# Altium PCB 20K Control Board V1.1.PcbDoc (part 15 of 24)
Units mm, origin at the board's own origin, x right, y up, seen from the top; angles counter-clockwise.
Board outline 132 x 260 mm, 4 copper layers (Top Layer, GND, VCC, Bottom Layer); 1384 components, 779 nets, 4515 pads, 1774 vias.
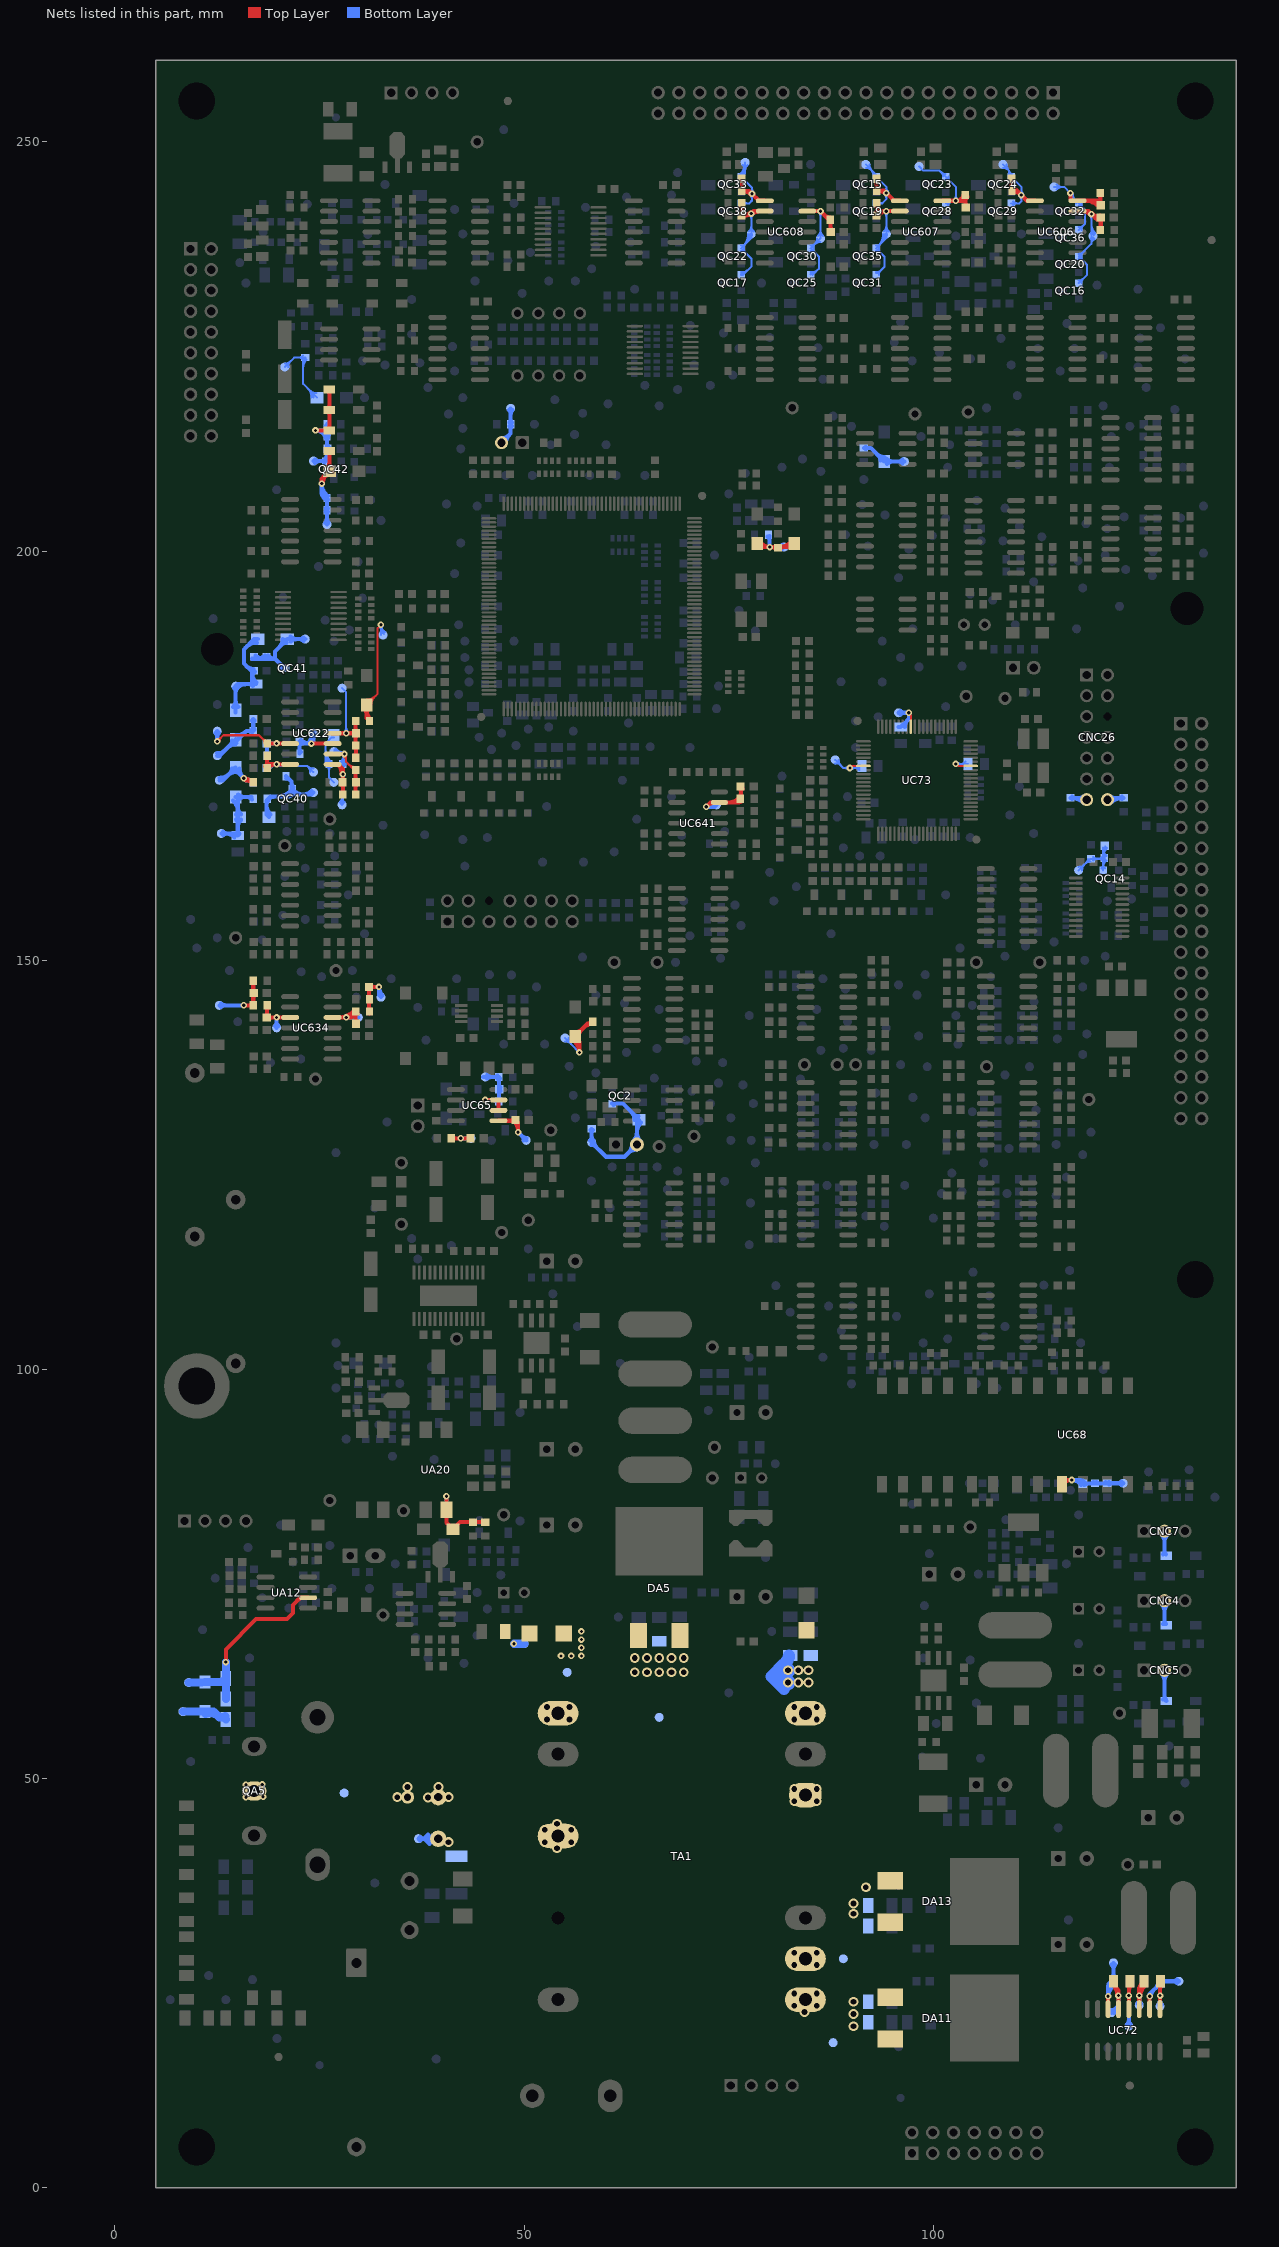
[diagram p17: the nets of this part, all layers, seen from the top]

## Via types
v1: diameter 0.8, hole 0.4, Top Layer to Bottom Layer, tented both sides, 1354 vias
v2: diameter 1.2, hole 0.7, Top Layer to Bottom Layer, 261 vias
v3: diameter 0.8, hole 0.4, Top Layer to Bottom Layer, 58 vias
v4: diameter 1.2, hole 0.7, Top Layer to Bottom Layer, tented top, 58 vias
v5: diameter 0.8, hole 0.4, Top Layer to Bottom Layer, tented top, 22 vias
v6: diameter 1.2, hole 0.7, Top Layer to Bottom Layer, tented both sides, 13 vias
v7: diameter 1.2, hole 0.7, Top Layer to Bottom Layer, tented bottom, 8 vias

## Nets (pads, with @x,y where several pads share a name; then routed paths per layer and width w, separated by ;. In a path a pad name is that pad's centre, name@x,y a point inside that pad or via, vN(x,y) a via of type N, cw(c..) or ccw(c..) an arc to the next point about the centre after c; other vN are vias at no path point) (continued)
NetCC227_1: CC227.1 pad.ICT@117.75,161 QC14.1 RC360.1 RC366.2 | length 18.1
  Bottom Layer w0.25: pad.ICT@117.75,161 119.15,162.4 RC360.1@119.25,162.4 RC366.2@120.75,162.4 ; pad.ICT@117.75,161.425 ccw(c117.75,162.451) 118.476,161.726 ccw(c119.201,161) pad.ICT@118.175,161 ; 118.56,161.81 cw(c119.2,161.17) RC360.1@119.2,162.075 ; 118.681,161.931 ccw(c118.211,162.4) RC360.1@118.875,162.4 ; RC360.1@119.53,162.17 cw(c120.085,161.615) 120.085,162.4 cw(c120.085,163.185) RC360.1@119.53,162.63 ; 119.995,162.4 ccw(c119.995,163.355) RC366.2@120.67,162.68 ; 120.236,162.4 cw(c120.236,161.786) RC366.2@120.67,162.22 ; QC14.1@120.515,161.235 ccw(c119.948,161.802) 120.75,161.802 ccw(c121.552,161.802) QC14.1@120.985,161.235 ; QC14.1@120.75,161 RC366.2@120.75,162.4 ; QC14.1@120.75,161.303 cw(c122.047,161.303) RC366.2@121.13,162.22 ; 120.75,161.907 cw(c121.443,161.907) RC366.2@120.953,162.397 ; RC366.2@120.75,162.612 cw(c122.338,162.612) CC227.1@121.215,163.735 ; 120.75,163.093 ccw(c121.443,163.093) RC366.2@120.953,162.603 ; 120.75,163.215 cw(c121.735,163.215) CC227.1@121.038,163.912 ; CC227.1@120.75,163.697 ccw(c122.047,163.697) RC366.2@121.13,162.78 ; CC227.1@120.75,163.8 RC366.2@120.75,162.4 ; RC366.2@120.8,162.4 RC366.2@120.75,162.4
NetCC228_2: CC228.2 pad.ICT@91.75,247.25 QC15.1 QC19.1 RC361.1 UC607.1 | length 21.9
  Top Layer w0.5: CC228.2@92.873,245.323 cw(c92.446,244.896) 93.05,244.896 cw(c93.654,244.896) CC228.2@93.227,245.323 ; RC361.1@93.05,244.05 CC228.2@93.05,245.5 ; 93.05,244.654 ccw(c93.704,244.654) 93.241,244.191 ccw(c93.583,244.533) 93.583,244.05 ccw(c93.583,243.567) RC361.1@93.241,243.909 ; RC361.1@93.1,244.05 93.95,244.05 ; RC361.1@93.164,244.05 cw(c93.164,242.664) v1@94.144,243.644 ; v1@94.5,243.5 95.19,242.81 UC607.1@95.9,242.81
  Bottom Layer w0.25: pad.ICT@91.75,246.825 cw(c91.75,245.799) 92.476,246.524 cw(c93.201,247.25) pad.ICT@92.175,247.25 ; pad.ICT@91.75,247.25 93,246 QC15.1@93,245.75 94.25,244.5 v1(94.25,243.75) 94.25,243 93.75,242.5 QC19.1@93,242.5 ; 92.256,246.744 cw(c91.262,245.75) QC15.1@92.668,245.75 ; 92.683,246.317 cw(c92.116,245.75) QC15.1@92.918,245.75 ; QC15.1@93,245.418 cw(c93,244.616) 93.567,245.183 cw(c94.134,245.75) QC15.1@93.332,245.75 ; QC19.1@93.246,242.277 cw(c93.75,241.82) 93.75,242.5 cw(c93.75,243.18) QC19.1@93.246,242.723 ; v1@94.056,243.556 cw(c93.586,243.086) 94.25,243.086 cw(c94.914,243.086) v1@94.444,243.556 ; v1@94.056,243.944 ccw(c93.586,244.414) 94.25,244.414 ccw(c94.914,244.414) v1@94.444,243.944
NetCC229_2: CC229.2 pad.ICT@119.5,238.5 QC16.1 QC20.1 RC362.1 UC606.13 | length 30.1
  Top Layer w0.5: UC606.13@117.6,241.54 118.96,241.54 119.75,240.75 CC229.2@120.45,240.75 ; UC606.13@118.097,241.54 cw(c118.097,239.968) v1@119.208,241.079 ; v1@119.31,241.19 ccw(c119.989,241.869) CC229.2@120.355,240.981 ; v1@119.437,241.272 ccw(c120.45,241.994) CC229.2@120.45,240.75 ; 119.84,240.66 ccw(c120.298,241.118) CC229.2@120.545,240.519 ; RC362.1@120.259,239.441 ccw(c119.796,239.904) 120.45,239.904 ; CC229.2@120.273,240.927 cw(c119.846,241.354) 119.846,240.75 cw(c119.846,240.146) 120.273,240.573 cw(c119.846,240.146) 120.45,240.146 cw(c121.054,240.146) CC229.2@120.627,240.573 ; RC362.1@120.45,239.3 CC229.2@120.45,240.75
  Bottom Layer w0.25: QC16.1@117.75,232.75 117.779,232.75 118.75,233.721 118.75,235.029 117.779,236 119.315,237.535 v1(119.315,241.185) ; QC16.1@117.75,233.082 ccw(c117.75,233.954) 118.367,233.338 ; QC20.1@117.75,235.668 cw(c117.75,234.796) 118.367,235.412 ; QC20.1@117.75,236.332 ccw(c117.75,237.204) 118.367,236.588 ; QC16.1@118.082,232.75 cw(c118.814,232.75) 118.297,233.268 ; 118.297,235.482 cw(c118.814,236) 118.082,236 cw(c118.814,236) 118.297,236.518 ; v1@119.12,240.991 cw(c118.651,240.522) 119.315,240.522 cw(c119.978,240.522) v1@119.509,240.991 ; pad.ICT@119.199,238.199 cw(c118.922,237.922) 119.315,237.922 ; pad.ICT@119.199,238.801 ccw(c118.922,239.078) 119.315,239.078 ; 119.315,237.518 cw(c119.985,237.518) pad.ICT@119.688,238.119 ; 119.315,237.92 cw(c119.786,237.92) pad.ICT@119.577,238.343 ; 119.315,239.37 ccw(c120.37,239.37) pad.ICT@119.624,238.624 ; 119.315,239.974 ccw(c120.974,239.974) pad.ICT@119.801,238.801
NetCC230_2: CC230.2 pad.ICT@77.75,238.75 QC17.1 QC22.1 RC364.1 UC608.2 | length 27.3
  Top Layer w0.5: CC230.2@76.373,241.177 ccw(c75.826,241.724) 76.6,241.724 ; RC364.1@76.459,242.309 cw(c76.117,241.967) 76.6,241.967 cw(c77.083,241.967) RC364.1@76.741,242.309 ; RC364.1@76.6,242.5 76.6,241.05 v1@77.55,241.05 ; CC230.2@76.727,240.823 cw(c77.274,240.276) 77.274,241.05 ; CC230.2@76.905,241.05 ccw(c76.905,242.095) v1@77.644,241.356 ; v1@77.856,241.144 cw(c78.812,240.188) UC608.2@78.812,241.54 ; 78.04,241.54 UC608.2@79.4,241.54
  Bottom Layer w0.25: QC17.1@76.5,233.75 76.75,233.75 77.75,234.75 77.75,235.75 QC22.1@76.5,237 77.75,238.25 v1(77.75,241.25) ; QC17.1@76.5,233.832 ccw(c76.5,234.634) 77.067,234.067 ; QC17.1@76.5,234.082 ccw(c76.5,235.488) 77.494,234.494 ; QC22.1@76.5,236.668 cw(c76.5,235.866) 77.067,236.433 cw(c77.634,237) 76.832,237 cw(c77.634,237) 77.067,237.567 cw(c76.5,238.134) QC22.1@76.5,237.332 ; QC22.1@76.75,237.25 ccw(c75.356,238.644) pad.ICT@77.325,238.731 ; 77.151,237.651 ccw(c76.125,238.678) pad.ICT@77.575,238.742 ; pad.ICT@77.449,239.051 ccw(c76.724,239.776) 77.75,239.776 ccw(c78.776,239.776) pad.ICT@78.051,239.051 ; 77.553,238.053 ccw(c76.894,238.712) pad.ICT@77.825,238.753 ; v1@77.556,241.056 cw(c77.086,240.586) 77.75,240.586 cw(c78.414,240.586) v1@77.944,241.056
NetCC237_2: CC237.2 pad.ICT@98.25,247 QC23.1 QC28.1 RC371.1 UC607.14 | length 22.7
  Top Layer w0.5: UC607.14@101.1,242.81 v1(102.75,242.81) ; 103.435,242.81 ccw(c103.435,243.599) RC371.1@104.186,243.359 ; RC371.1@103.709,243.511 cw(c102.75,243.817) v1(102.75,242.81) ; RC371.1@103.759,243.309 cw(c103.417,242.967) 103.9,242.967 cw(c104.383,242.967) RC371.1@104.041,243.309 ; 103.84,242.81 v1(102.75,242.81) ; CC237.2@103.9,242.05 RC371.1@103.9,243.5 ; 103.9,242.724 ccw(c104.674,242.724) CC237.2@104.127,242.177
  Bottom Layer w0.25: pad.ICT@98.25,247 98.75,246.5 100.75,246.5 QC23.1@101.5,245.75 102.75,244.5 v1(102.75,242.81) ; QC23.1@101.168,245.75 ccw(c100.366,245.75) 100.933,246.317 ccw(c101.5,246.884) QC23.1@101.5,246.082 ; QC23.1@101.5,245.418 cw(c101.5,244.616) 102.067,245.183 cw(c102.634,245.75) QC23.1@101.832,245.75 ; QC28.1@101.567,242.452 cw(c102.263,241.953) 102.263,242.81 ; QC28.1@101.69,242.81 v1(102.75,242.81) ; QC28.1@101.77,242.307 cw(c102.75,241.605) v1(102.75,242.81) ; v1@102.556,242.616 ccw(c102.086,242.146) 102.086,242.81 ccw(c102.086,243.474) 102.556,243.004 ccw(c102.086,243.474) 102.75,243.474 ccw(c103.414,243.474) v1@102.944,243.004
NetCC238_2: CC238.2 pad.ICT@108.5,247.25 QC24.1 QC29.1 RC372.1 UC606.1 | length 23.5
  Top Layer w0.5: CC238.2@109.373,245.323 cw(c108.946,244.896) 109.55,244.896 cw(c110.154,244.896) CC238.2@109.727,245.323 ; RC372.1@109.454,244.212 cw(c109.731,243.716) 110.132,244.118 ; RC372.1@109.55,244.05 CC238.2@109.55,245.5 ; 109.55,244.654 ccw(c110.204,244.654) RC372.1@109.741,244.191 ; RC372.1@109.593,244.25 cw(c109.614,243.319) 110.273,243.977 ; RC372.1@109.6,244 110.25,244 v1(110.75,243.5) 111.44,242.81 UC606.1@112.4,242.81 ; RC372.1@109.698,243.775 cw(c110.066,243.116) v1@110.6,243.65 ; RC372.1@109.741,243.859 cw(c110.083,243.517) 110.083,244 cw(c110.083,244.483) RC372.1@109.741,244.141 ; 111.242,243.008 ccw(c111.6,243.367) UC606.1@111.6,242.86
  Bottom Layer w0.25: pad.ICT@108.5,246.825 cw(c108.5,245.799) 109.226,246.524 cw(c109.951,247.25) pad.ICT@108.925,247.25 ; pad.ICT@108.5,247.25 109.25,246.5 ; QC24.1@109.25,246 109.25,246.5 ; QC24.1@109.25,246.178 ccw(c109.61,246.178) QC24.1@109.52,245.83 ; QC29.1@109.5,242.5 110.5,242.5 110.75,242.75 v1(110.75,243.5) 110.75,244.5 QC24.1@109.5,245.75 ; QC24.1@109.5,245.418 cw(c109.5,244.616) 110.067,245.183 cw(c110.634,245.75) QC24.1@109.832,245.75 ; QC24.1@109.582,246.072 cw(c109.692,246.5) 109.25,246.5 ; QC29.1@109.735,242.265 cw(c110.302,241.698) 110.302,242.5 cw(c110.302,243.302) QC29.1@109.735,242.735 ; v1@110.556,243.306 cw(c110.086,242.836) 110.75,242.836 cw(c111.414,242.836) v1@110.944,243.306 ; v1@110.556,243.694 ccw(c110.086,244.164) 110.75,244.164 ccw(c111.414,244.164) v1@110.944,243.694
NetCC239_2: CC239.2 pad.ICT@86.21,238.21 QC25.1 QC30.1 RC373.1 UC608.13 | length 24.4
  Top Layer w0.5: UC608.13@84.6,241.54 v1(86.21,241.54) 87.45,240.3 CC239.2@87.45,239 ; 86.717,241.033 ccw(c87.4,241.716) RC373.1@87.4,240.75 ; RC373.1@87.259,240.309 cw(c86.796,239.846) 87.45,239.846 ; CC239.2@87.273,239.177 ccw(c86.846,239.604) 87.45,239.604 ccw(c88.054,239.604) CC239.2@87.627,239.177
  Bottom Layer w0.25: QC25.1@85,233.832 ccw(c85,234.634) 85.567,234.067 ; QC25.1@85,234.082 ccw(c85,235.488) 85.994,234.494 ; QC30.1@85,236.668 cw(c85,235.866) 85.567,236.433 cw(c86.134,237) 85.332,237 cw(c86.134,237) 85.567,237.567 cw(c85,238.134) QC30.1@85,237.332 ; QC25.1@85.25,233.75 86,234.5 86,236 QC30.1@85,237 pad.ICT@86.21,238.21 v1(86.21,241.54) ; pad.ICT@85.785,238.21 cw(c84.759,238.21) 85.484,237.484 cw(c86.21,236.759) pad.ICT@86.21,237.785 ; pad.ICT@85.909,238.511 ccw(c85.184,239.236) 86.21,239.236 ccw(c87.236,239.236) pad.ICT@86.511,238.511 ; v1@86.016,241.346 cw(c85.546,240.876) 86.21,240.876 cw(c86.874,240.876) v1@86.404,241.346
NetCC250_2: CC250.2 pad.ICT@94.25,238.75 QC31.1 QC35.1 RC383.1 UC607.2 | length 26.6
  Top Layer w0.5: CC250.2@92.82,241.099 cw(c93.49,240.81) 93.49,241.54 ; CC250.2@92.873,241.177 ccw(c92.326,241.724) 93.1,241.724 ; RC383.1@92.959,242.309 cw(c92.617,241.967) 93.1,241.967 cw(c93.583,241.967) RC383.1@93.241,242.309 ; CC250.2@93.1,241.05 RC383.1@93.1,242.5 ; CC250.2@93.28,240.901 cw(c94.25,240.484) v1(94.25,241.54) ; 93.31,241.54 v1(94.25,241.54) ; UC607.2@95.9,241.54 v1(94.25,241.54)
  Bottom Layer w0.25: QC31.1@93,234 93.282,234 94,234.718 94,236 QC35.1@93,237 94.25,238.25 v1(94.25,241.54) ; QC31.1@93,234.082 ccw(c93,234.961) 93.621,234.34 ; QC35.1@93,236.668 cw(c93,235.866) 93.567,236.433 cw(c94.134,237) 93.332,237 cw(c94.134,237) 93.567,237.567 cw(c93,238.134) QC35.1@93,237.332 ; QC35.1@93.25,237.25 ccw(c91.856,238.644) pad.ICT@93.825,238.731 ; QC31.1@93.332,233.75 cw(c94.057,233.75) 93.545,234.263 ; 93.651,237.651 ccw(c92.625,238.678) pad.ICT@94.075,238.742 ; pad.ICT@93.949,239.051 ccw(c93.224,239.776) 94.25,239.776 ccw(c95.276,239.776) pad.ICT@94.551,239.051 ; 94.053,238.053 ccw(c93.394,238.712) pad.ICT@94.325,238.753 ; v1@94.056,241.346 cw(c93.586,240.876) 94.25,240.876 cw(c94.914,240.876) v1@94.444,241.346
NetCC265_2: CC265.2 pad.ICT@24.25,173 RC443.1 RC444.2 UC622.7 | length 19.3
  Top Layer w0.5: RC444.2@18.338,173.696 cw(c18.788,173.445) RC444.2@18.788,173.96 ; RC444.2@18.459,173.691 ccw(c18.117,174.033) 18.6,174.033 ccw(c19.083,174.033) RC444.2@18.741,173.691 ; RC443.1@18.459,174.809 cw(c18.117,174.467) 18.6,174.467 cw(c19.083,174.467) RC443.1@18.741,174.809 ; RC444.2@18.6,173.5 RC443.1@18.6,175 ; RC444.2@18.64,173.96 v1@19.64,173.96 ; RC444.2@18.775,173.452 cw(c19.64,172.969) v1@19.64,173.96 ; v1(19.75,173.96) v1@19.64,173.96 ; v1@19.856,174.066 ccw(c20.16,174.37) 20.16,173.94 ; UC622.7@21.4,173.94 19.66,173.94 v1@19.64,173.96
  Bottom Layer w0.25: v1(19.75,173.96) 19.79,173.96 20,173.75 23.5,173.75 pad.ICT@24.25,173 ; v1@19.768,173.978 ccw(c20.317,174.527) 20.317,173.75 ; v1@19.944,174.154 ccw(c20.921,175.131) 20.921,173.75 ; pad.ICT@23.825,173 ccw(c22.799,173) 23.524,173.726 ccw(c24.25,174.451) pad.ICT@24.25,173.425
  Bottom Layer w0.5: CC265.2@18.331,173.62 cw(c18.905,173.305) CC265.2@18.905,173.96 ; CC265.2@18.6,173.45 19.11,173.96 v1(19.75,173.96) ccw(c19.75,172.841) CC265.2@18.769,173.38
NetCC266_2: CC266.2 pad.ICT@12.5,178 RC445.1 RC446.2 UC622.5 | length 20
  Top Layer w0.25: v1(12.5,176.75) 13.25,177.5 17.6,177.5 RC445.1@18.6,176.5 ; v1@12.5,177.025 ccw(c12.5,177.689) 12.969,177.219 ccw(c13.439,176.75) v1@12.775,176.75 ; 17.96,177.14 ccw(c18.6,177.78) RC445.1@18.6,176.875 ; 18.081,177.019 cw(c17.611,176.55) RC445.1@18.275,176.55
  Top Layer w0.5: RC445.1@18.6,176.5 v1(19.75,176.5) UC622.5@21.38,176.5 ; RC445.1@18.741,176.359 cw(c19.083,176.017) 19.083,176.5 cw(c19.083,176.983) RC445.1@18.741,176.641 ; UC622.5@21.38,176.48 UC622.5@21.4,176.48
  Bottom Layer w0.5: pad.ICT@12.288,177.788 cw(c11.776,177.276) 12.5,177.276 cw(c13.224,177.276) pad.ICT@12.712,177.788 ; v1(12.5,176.75) pad.ICT@12.5,178 ; CC266.2@18.373,176.323 cw(c17.826,175.776) 18.6,175.776 ; RC446.2@18.459,175.191 ccw(c18.117,175.533) 18.6,175.533 ccw(c19.083,175.533) RC446.2@18.741,175.191 ; CC266.2@18.55,176.5 v1(19.75,176.5) ; RC446.2@18.6,175 CC266.2@18.6,176.45 ; CC266.2@18.727,176.323 cw(c19.154,175.896) 19.154,176.5 cw(c19.154,177.104) CC266.2@18.727,176.677
NetCC270_2: CC270.2 DC45.2 DC46.1 pad.ICT@13,165.5 RC458.2 | length 19.3
  Bottom Layer w0.5: pad.ICT@13,165.5 CC270.2@15,165.5 ; pad.ICT@13.212,165.288 cw(c13.724,164.776) 13.724,165.5 cw(c13.724,166.224) pad.ICT@13.212,165.712 ; pad.ICT@13.472,165.5 cw(c13.472,163.922) CC270.2@14.588,165.038 ; DC46.1@14.432,169.532 cw(c13.06,168.16) DC45.2@15,168.16 ; DC46.1@14.75,169.95 RC458.2@16.7,169.95 ; DC45.2@14.782,167.182 cw(c14.255,166.655) 15,166.655 ; DC45.2@14.782,167.818 ccw(c14.255,168.345) 15,168.345 ; CC270.2@14.788,165.462 ccw(c14.276,165.974) 15,165.974 ccw(c15.724,165.974) CC270.2@15.212,165.462 ; CC270.2@15,165.25 DC46.1@15,169.7 ; 15,166.172 cw(c16.428,166.172) DC45.2@15.418,167.182 ; 15,168.828 ccw(c16.428,168.828) DC45.2@15.418,167.818 ; DC46.1@15.068,169.632 cw(c15.836,168.864) 15.836,169.95 cw(c15.836,171.036) DC46.1@15.068,170.268 ; 16.055,169.95 cw(c16.055,168.955) RC458.2@16.759,169.659
NetCC272_2: CC272.2 DC47.2 DC48.1 pad.ICT@14.75,183.5 RC461.2 | length 22.8
  Bottom Layer w0.5: DC48.1@14.432,180.968 ccw(c13.664,181.736) 14.75,181.736 ccw(c15.836,181.736) DC48.1@15.068,180.968 ; pad.ICT@14.538,183.288 cw(c14.026,182.776) 14.75,182.776 cw(c15.474,182.776) 14.962,183.288 cw(c16.078,182.172) 16.078,183.75 ; DC48.1@14.75,180.3 DC48.1@14.75,180.55 pad.ICT@14.75,183.5 15,183.75 CC272.2@16.75,183.75 ; 15.984,188.234 cw(c17.35,186.869) DC47.2@17.35,188.8 ; 16.011,185.989 ccw(c16.95,186.928) RC461.2@16.95,185.6 ; 16.75,184.434 cw(c17.916,184.434) RC461.2@17.091,185.259 ; CC272.2@16.838,183.538 ccw(c16.326,183.026) 16.326,183.75 ccw(c16.326,184.474) CC272.2@16.838,183.962 ; RC461.2@17,185.4 16.6,185.4 15.75,186.25 15.75,188 17,189.25 DC47.2@17.45,189.25 ; CC272.2@17.25,183.75 CC272.2@16.75,183.75 ; CC272.2@17.257,183.967 cw(c18.383,185.15) 16.75,185.15 CC272.2@16.75,183.75
NetCC282_2: CC282.2 pad.ICT@27.75,183.25 RC482.2 RC483.1 RC485.2 UC622.11 | length 18.8
  Top Layer w0.5: UC622.11@26.6,177.75 CC282.2@29.45,177.75 ; RC482.2@29.259,174.941 ccw(c28.796,175.404) 29.45,175.404 ; RC485.2@29.259,176.059 cw(c28.796,175.596) 29.45,175.596 ; RC485.2@29.259,176.441 ccw(c28.917,176.783) 29.4,176.783 ccw(c29.883,176.783) RC485.2@29.541,176.441 ; RC483.1@29.259,179.059 cw(c28.917,178.717) 29.4,178.717 cw(c29.883,178.717) RC483.1@29.541,179.059 ; CC282.2@29.273,177.573 ccw(c28.846,177.146) 28.846,177.75 ccw(c28.846,178.354) CC282.2@29.273,177.927 ; RC482.2@29.4,174.75 29.45,174.8 RC485.2@29.45,176.25 ; RC485.2@29.4,176.25 RC483.1@29.4,179.25 ; 29.4,177.026 cw(c30.174,177.026) CC282.2@29.627,177.573 ; 29.4,178.474 ccw(c30.174,178.474) CC282.2@29.627,177.927
  Bottom Layer w0.25: pad.ICT@27.75,183.25 28.25,182.75 v1(28.25,177.75) ; v1@28.056,177.944 ccw(c27.586,178.414) 28.25,178.414 ccw(c28.914,178.414) v1@28.444,177.944
NetCC283_2: CC283.2 pad.ICT@26.75,175.5 RC484.1 RC486.2 RC489.2 UC622.9 | length 18.2
  Top Layer w0.25: v1@27.873,174.992 cw(c27.287,174.227) 28.25,174.227 ; v1@28.025,175.19 cw(c27.675,174.734) 28.25,174.734 ; v1(28.04,175.21) 28.25,175 28.25,174.25 29.25,173.25 RC486.2@29.4,173.25 ; 28.504,173.996 ccw(c29.4,174.892) RC486.2@29.4,173.625 ; 28.931,173.569 ccw(c29.4,174.039) RC486.2@29.4,173.375 ; RC486.2@28.987,173.513 cw(c28.773,173.3) RC486.2@29.075,173.3
  Top Layer w0.5: UC622.9@26.6,175.21 v1(28.04,175.21) ; RC489.2@29.259,170.441 ccw(c28.917,170.783) 29.4,170.783 ccw(c29.883,170.783) RC489.2@29.541,170.441 ; RC486.2@29.259,173.059 cw(c28.917,172.717) 29.4,172.717 cw(c29.883,172.717) RC486.2@29.541,173.059 ; RC489.2@29.4,170.25 RC486.2@29.4,173.25 ; 29.4,171.026 cw(c30.174,171.026) CC283.2@29.627,171.573 ; 29.4,172.474 ccw(c30.174,172.474) CC283.2@29.627,171.927
  Bottom Layer w0.5: pad.ICT@26.75,175.25 28,175.25 cw(c28,176.645) pad.ICT@26.971,175.703 ; 27.581,175.25 cw(c27.581,174.751) v1@27.934,175.104 ; RC484.1@27.709,174.191 ccw(c26.908,174.992) v1@28.04,174.992 ; RC484.1@27.85,173.75 28.04,173.94 v1(28.04,175.21)
NetCC286_2: CC286.2 DC41.1 DC43.1 DC44.1 pad.ICT@24.25,211 QC42.1 RC490.1 RC492.2 | length 27.6
  Top Layer w0.5: v1(24.5,214.75) DC41.1@26.2,214.75 DC43.1@26.2,217.25 DC44.1@26.2,219.75 ; DC41.1@25.823,214.573 ccw(c25.396,214.146) 25.396,214.75 ccw(c25.396,215.354) DC41.1@25.823,214.927 ; DC41.1@26.023,214.927 ccw(c25.596,215.354) 26.2,215.354 ccw(c26.804,215.354) DC41.1@26.377,214.927 ; DC43.1@26.023,217.073 cw(c25.596,216.646) 26.2,216.646 cw(c26.804,216.646) DC43.1@26.377,217.073 ; DC43.1@26.023,217.427 ccw(c25.596,217.854) 26.2,217.854 ccw(c26.804,217.854) DC43.1@26.377,217.427 ; DC44.1@26.023,219.573 cw(c25.596,219.146) 26.2,219.146 cw(c26.804,219.146) DC44.1@26.377,219.573
  Bottom Layer w0.5: pad.ICT@24.25,211 QC42.1@25.75,211 ; pad.ICT@24.462,210.788 cw(c24.974,210.276) 24.974,211 cw(c24.974,211.724) pad.ICT@24.462,211.212 ; 25.278,214.75 cw(c25.278,213.766) RC492.2@26.173,214.175 ; QC42.1@25.603,210.853 ccw(c25.25,210.5) 25.25,211 ccw(c25.25,211.5) 25.603,211.147 ccw(c24.888,211.862) 25.9,211.862 ; RC492.2@25.718,213.967 ccw(c24.5,213.411) v1(24.5,214.75) 25.9,214.75 ; RC492.2@25.759,213.809 cw(c25.417,213.467) 25.9,213.467 cw(c26.383,213.467) RC492.2@26.041,213.809 ; RC492.2@25.759,214.191 ccw(c25.417,214.533) 25.9,214.533 ccw(c26.383,214.533) RC492.2@26.041,214.191 ; RC490.1@25.759,215.309 cw(c25.417,214.967) 25.9,214.967 cw(c26.383,214.967) RC490.1@26.041,215.309 ; QC42.1@25.9,211.15 RC492.2@25.9,214 RC490.1@25.9,215.5 ; 25.9,211.776 cw(c26.674,211.776) CC286.2@26.127,212.323 ; 25.9,213.224 ccw(c26.674,213.224) CC286.2@26.127,212.677
NetCC306_2: CC306.2 pad.ICT@114.75,244.5 QC32.1 QC36.1 RC384.1 UC606.14 | length 25.1
  Top Layer w0.5: v1(116.75,243.75) 116.75,243 116.94,242.81 UC606.14@117.6,242.81 120.4,242.81 ; UC606.14@118.494,242.81 cw(c118.494,240.294) CC306.2@120.273,242.073 ; 119.702,242.81 cw(c119.702,241.502) 120.627,242.427 cw(c121.174,242.974) 120.4,242.974 ; RC384.1@120.259,243.559 cw(c119.917,243.217) 120.4,243.217 cw(c120.883,243.217) RC384.1@120.541,243.559 ; CC306.2@120.4,242.3 RC384.1@120.4,243.75
  Bottom Layer w0.25: pad.ICT@114.75,244.5 115.984,244.5 116.734,243.75 v1(116.75,243.75) 116.75,243.5 QC32.1@117.75,242.5 118.532,241.718 118.532,240.003 117.779,239.25 QC36.1@117.75,239.25 ; pad.ICT@115.051,244.199 cw(c115.776,243.474) 115.776,244.5 cw(c115.776,245.526) pad.ICT@115.051,244.801 ; v1@116.775,243.75 ccw(c117.439,243.75) 116.969,243.281 ; v1@117.025,243.75 ccw(c118.292,243.75) QC32.1@117.396,242.854 ; QC32.1@117.418,242.5 ccw(c116.616,242.5) 117.183,243.067 ccw(c117.75,243.634) QC32.1@117.75,242.832 ; QC36.1@117.75,239.582 ccw(c117.75,240.454) 118.367,239.838 ; QC32.1@117.75,242.168 cw(c117.75,241.366) 118.317,241.933 cw(c118.884,242.5) QC32.1@118.082,242.5 ; QC36.1@118.082,239.25 cw(c118.814,239.25) 118.297,239.768
NetCC307_2: CC307.2 pad.ICT@77,247.5 QC33.1 QC38.1 RC385.1 UC608.1 | length 24.8
  Top Layer w0.5: CC307.2@76.373,245.323 cw(c75.826,244.776) 76.6,244.776 ; RC385.1@76.459,244.191 ccw(c76.117,244.533) 76.6,244.533 ccw(c77.083,244.533) RC385.1@76.741,244.191 ; CC307.2@76.55,245.5 76.6,245.45 RC385.1@76.6,244 77.5,244 ; RC385.1@76.659,244 cw(c76.659,242.482) v1@77.732,243.555 ; RC385.1@76.741,243.859 cw(c77.083,243.517) 77.083,244 cw(c77.083,244.483) RC385.1@76.741,244.141 ; v1(77.838,243.662) 78.69,242.81 UC608.1@79.4,242.81
  Bottom Layer w0.25: QC33.1@76.29,246.008 ccw(c75.076,247.5) pad.ICT@77,247.5 77,246.25 QC33.1@76.5,245.75 77.838,244.412 v1(77.838,243.662) 77.838,242.838 77.5,242.5 QC38.1@76.5,242.5 ; QC33.1@76.448,245.814 ccw(c75.504,246.974) pad.ICT@77,246.974 ; QC33.1@76.5,245.418 cw(c76.5,244.616) 77.067,245.183 cw(c77.634,245.75) QC33.1@76.832,245.75 ; QC33.1@76.606,245.62 ccw(c75.932,246.449) 77,246.449 ; pad.ICT@76.699,247.199 cw(c75.974,246.474) 77,246.474 cw(c78.026,246.474) pad.ICT@77.301,247.199 ; QC38.1@76.735,242.265 cw(c77.302,241.698) 77.302,242.5 cw(c77.302,243.302) QC38.1@76.735,242.735 ; v1@77.644,243.467 cw(c77.175,242.998) 77.838,242.998 cw(c78.502,242.998) v1@78.033,243.467 ; v1@77.644,243.856 ccw(c77.175,244.325) 77.838,244.325 ccw(c78.502,244.325) v1@78.033,243.856
NetCC346_2: CC346.2 pad.ICT@27.75,169 RC477.2 UC622.8 | length 15
  Top Layer w0.5: UC622.8@26.6,173.94 27.31,173.94 27.85,173.4 RC477.2@27.85,170.25 ; UC622.8@27.245,173.996 cw(c25.769,172.75) v1@27.7,172.75 ; CC346.2@27.623,171.573 cw(c27.076,171.026) 27.85,171.026 ; CC346.2@27.623,171.927 ccw(c27.076,172.474) v1@27.85,172.474 ; RC477.2@27.709,170.441 ccw(c27.367,170.783) 27.85,170.783 ccw(c28.333,170.783) RC477.2@27.991,170.441
  Bottom Layer w0.25: pad.ICT@27.449,169.301 ccw(c26.483,170.267) 27.85,170.267 ; pad.ICT@27.626,169.124 ccw(c27.086,169.664) 27.85,169.664 ; v1@27.656,172.556 cw(c27.186,172.086) 27.85,172.086 cw(c28.514,172.086) v1@28.044,172.556 ; pad.ICT@27.75,169 27.85,169.1 v1(27.85,172.75) ; 27.85,169.785 ccw(c28.535,169.785) pad.ICT@28.051,169.301
NetCC347_2: CC347.2 pad.ICT@24.25,177.75 RC480.2 UC622.10 | length 14.7
  Top Layer w0.5: v1(24,176.48) UC622.10@26.6,176.48
  Bottom Layer w0.5: CC347.2@22.373,176.573 cw(c21.946,176.146) 22.55,176.146 cw(c23.154,176.146) CC347.2@22.727,176.573 ; RC480.2@22.55,175.25 CC347.2@22.55,176.75 ; 22.55,175.904 ccw(c23.204,175.904) RC480.2@22.741,175.441 ; CC347.2@22.727,176.927 ccw(c23.805,178.005) v1@23.805,176.48 ; CC347.2@22.82,176.48 v1(24,176.48) 24.25,176.73 pad.ICT@24.25,177.75 pad.ICT@24.25,177.23 ; 23.5,176.48 pad.ICT@24.25,177.23 ; v1@23.76,176.74 ccw(c23.14,177.36) pad.ICT@23.967,177.65 ; v1@23.894,176.586 ccw(c23.034,177.446) pad.ICT@24.25,177.446 ; pad.ICT@24.038,177.538 cw(c23.526,177.026) 24.25,177.026 cw(c24.974,177.026) pad.ICT@24.462,177.538 ; v1@24.135,176.546 cw(c24.673,176.807) pad.ICT@24.25,177.23
NetCC396_1: CC396.1 pad.ICT@43.5,128.25 RC614.1 | length 6.8
  Top Layer w0.5: RC614.1@41.1,128.25 CC396.1@43.45,128.25 ; RC614.1@41.241,128.109 cw(c41.583,127.767) 41.583,128.25 cw(c41.583,128.733) RC614.1@41.241,128.391 ; CC396.1@43.273,128.073 ccw(c42.846,127.646) 42.846,128.25 ccw(c42.846,128.854) CC396.1@43.273,128.427
  Bottom Layer w0.5: v1(42.25,128.25) pad.ICT@43.5,128.25 pad.ICT@43.75,128.5 ; pad.ICT@43.288,128.038 ccw(c42.776,127.526) 42.776,128.25 ccw(c42.776,128.974) pad.ICT@43.288,128.462
NetCC397_1: CC397.1 pad.4@50.25,128 UC65.5 | length 8.3
  Top Layer w0.5: UC65.5@46.85,130.395 CC397.1@48.95,130.395 ; 48.093,130.395 ccw(c48.093,131.357) CC397.1@48.773,130.677 ; CC397.1@48.773,130.323 cw(c47.622,129.172) v1@49.25,129.172 ; CC397.1@48.95,130.5 49.25,130.2 v1(49.25,129)
  Bottom Layer w0.5: v1(49.25,129) pad.4@50.25,128 ; pad.4@49.95,128 ccw(c49.226,128) 49.738,128.512 ccw(c50.25,129.024) pad.4@50.25,128.3
NetCC398_1: CC398.1 pad.1@45.25,135.75 RC610.1 RC615.2 UC65.6 UC65.7 | length 14.5
  Top Layer w0.5: v1(45.25,132.935) UC65.7@46.85,132.935 UC65.6@46.85,131.665
  Bottom Layer w0.5: pad.1@45,135.75 RC610.1@46.9,135.75 RC615.2@46.9,132.75 ; v1(45.25,132.935) RC615.2@46.635,132.935 ; pad.1@45.462,135.538 cw(c45.974,135.026) 45.974,135.75 cw(c45.974,136.474) pad.1@45.462,135.962 ; 46.091,132.935 cw(c46.091,131.991) RC615.2@46.759,132.659 ; RC615.2@46.759,132.941 ccw(c46.417,133.283) 46.9,133.283 ccw(c47.383,133.283) RC615.2@47.041,132.941 ; RC610.1@46.759,135.559 cw(c46.417,135.217) 46.9,135.217 cw(c47.383,135.217) RC610.1@47.041,135.559 ; RC610.1@46.759,135.609 ccw(c46.417,135.267) 46.417,135.75 ccw(c46.417,136.233) RC610.1@46.759,135.891 ; 46.9,133.526 cw(c47.674,133.526) CC398.1@47.127,134.073 ; 46.9,134.974 ccw(c47.674,134.974) CC398.1@47.127,134.427
NetCC402_1: CC402.1 pad.5@123.2,86.1 RC621.1 RC627.2 UC68.1 | length 15.6
  Top Layer w0.5: UC68.1@115.73,86 116.23,86.5 v1(116.9,86.5) ; UC68.1@115.977,86.153 cw(c116.816,85.314) v1@116.816,86.5 ; UC68.1@115.977,86.647 ccw(c116.334,87.004) 116.334,86.5
  Bottom Layer w0.5: CC402.1@117.864,86.5 cw(c117.864,85.778) CC402.1@118.454,86.194 ; CC402.1@118.046,85.906 ccw(c116.9,85.098) v1(116.9,86.5) 117.8,86.5 CC402.1@118.25,86.05 RC621.1@121.2,86.05 ; CC402.1@118.427,85.873 cw(c118.854,85.446) 118.854,86.05 cw(c118.854,86.654) CC402.1@118.427,86.227 ; 119.096,86.05 ccw(c119.096,86.704) RC627.2@119.559,86.241 ; RC627.2@119.941,86.241 ccw(c120.404,86.704) 120.404,86.05 ; 120.596,86.05 ccw(c120.596,86.704) RC621.1@121.059,86.241 ; RC621.1@121.25,86.1 pad.5@123.2,86.1 ; RC621.1@121.441,85.959 cw(c121.783,85.617) 121.783,86.1 cw(c121.783,86.583) RC621.1@121.441,86.241 ; pad.5@122.988,85.888 ccw(c122.476,85.376) 122.476,86.1 ccw(c122.476,86.824) pad.5@122.988,86.312
NetCC409_1: CC409.1 UC73.54 | length 6.1
  Top Layer w0.25: v1(102.75,174) 103,173.75 UC73.54@104.55,173.75
  Bottom Layer w0.25: v1(102.75,174) CC409.1@104.25,174 ; v1@102.944,173.806 cw(c103.414,173.336) 103.414,174 cw(c103.414,174.664) v1@102.944,174.194 ; CC409.1@103.949,173.699 ccw(c103.224,172.974) 103.224,174 ccw(c103.224,175.026) CC409.1@103.949,174.301
NetCC412_1: CC412.1 pad.6@130,25.25 UC72.2 | length 10.4
  Top Layer w0.5: UC72.2@126.425,21.85 v1(126.425,23.425)
  Bottom Layer w0.5: v1(126.425,23.425) 126.425,23.675 127.75,25 CC412.1@127.75,25.25 pad.6@130,25.25 ; v1@126.575,23.425 cw(c127.541,23.425) 126.858,24.108 ; 127.203,24.453 ccw(c126.605,25.05) CC412.1@127.45,25.05 ; CC412.1@127.323,24.573 cw(c127.75,24.146) CC412.1@127.75,24.75 ; CC412.1@127.962,25.038 cw(c128.474,24.526) 128.474,25.25 cw(c128.474,25.974) CC412.1@127.962,25.462 ; pad.6@129.788,25.038 ccw(c129.276,24.526) 129.276,25.25 ccw(c129.276,25.974) pad.6@129.788,25.462
NetCC413_1: CC413.1 pad.8@125.155,22.345 UC72.3 | length 10.5
  Top Layer w0.5: UC72.3@125.155,21.85 125.155,24.405 125.75,25 CC413.1@125.75,25.25 ; UC72.3@125.155,22.889 cw(c127.911,22.889) CC413.1@125.962,24.838 ; 125.155,24.096 cw(c126.704,24.096) CC413.1@125.609,25.191 ; 125.203,24.453 ccw(c124.605,25.05) CC413.1@125.45,25.05 ; CC413.1@125.323,24.573 cw(c125.75,24.146) CC413.1@125.75,24.75
  Bottom Layer w0.5: pad.8@124.943,22.557 ccw(c124.431,23.069) 125.155,23.069 ccw(c125.879,23.069) pad.8@125.367,22.557 ; pad.8@125.155,22.345 v1(125.155,23.5)
NetCC413_2: CC413.2 pad.7@127.695,22.195 UC72.1 | length 7
  Top Layer w0.5: CC413.2@127.538,24.838 cw(c127.159,24.459) 127.695,24.459 ; UC72.1@127.695,21.85 127.695,25.195 CC413.2@127.75,25.25 ; 127.695,24.193 cw(c128.607,24.193) CC413.2@127.962,24.838
  Bottom Layer w0.5: pad.7@127.483,22.407 ccw(c126.971,22.919) 127.695,22.919 ccw(c128.419,22.919) pad.7@127.907,22.407 ; pad.7@127.695,22.195 v1(127.695,23.5)
NetCC414_1: CC414.1 pad.11 UC72.4 | length 9
  Top Layer w0.5: UC72.4@123.885,21.85 CC414.1@123.885,25.135 ; 123.885,24.048 cw(c125.002,24.048) CC414.1@124.212,24.838
  Bottom Layer w0.5: pad.11@123.673,19.962 ccw(c123.161,20.474) 123.885,20.474 ccw(c124.609,20.474) pad.11@124.097,19.962 ; pad.11@123.885,19.75 v1(123.885,23.5)
NetCC414_2: CC414.2 pad.10 UC72.5 | length 9
  Top Layer w0.5: CC414.2@121.91,24.84 cw(c120.57,23.5) v1@122.465,23.5 ; CC414.2@122,24.75 122.615,24.135 UC72.5@122.615,21.85 ; CC414.2@122.288,24.967 ccw(c122.956,24.776) 122.465,24.285
  Bottom Layer w0.5: pad.10@121.75,21.409 122.615,22.274 v1(122.615,23.5) ; pad.10@121.75,21.709 ccw(c121.75,22.433) 122.262,21.921 ccw(c122.774,21.409) pad.10@122.05,21.409
NetCC415_1: CC415.1 pad.9 UC72.6 | length 14.4
  Top Layer w0.5: UC72.6@121.345,21.85 v1(121.345,23.405)
  Bottom Layer w0.5: v1@121.345,23.279 cw(c123.164,23.279) CC415.1@122.165,24.799 ; v1(121.345,23.405) 121.345,24.345 122,25 CC415.1@122,25.25 pad.9@122,27.5 ; 121.345,24.088 cw(c122.007,24.088) CC415.1@122.002,24.75 ; 121.345,24.206 cw(c122.554,24.206) CC415.1@121.89,25.217 ; 121.345,24.592 cw(c122.003,24.592) CC415.1@122,25.25 ; 121.453,24.453 ccw(c120.855,25.05) CC415.1@121.7,25.05 ; CC415.1@121.573,24.573 cw(c122,24.146) CC415.1@122,24.75 ; CC415.1@121.788,25.662 ccw(c121.276,26.174) 122,26.174 ccw(c122.724,26.174) CC415.1@122.212,25.662 ; pad.9@121.788,27.288 cw(c121.276,26.776) 122,26.776 cw(c122.724,26.776) pad.9@122.212,27.288
NetCC426_1: CC426.1 pad.12 RC664.2 UC641.13 | length 13.3
  Top Layer w0.5: v1(72.25,168.75) 72.79,169.29 UC641.13@73.85,169.29 75.94,169.29 76.5,169.85 CC426.1@76.5,170.95 ; v1@72.485,168.985 cw(c73.1,168.371) UC641.13@73.1,169.24 ; 72.635,169.135 cw(c72.947,168.823) UC641.13@73.084,169.242 ; 74.927,169.29 ccw(c74.927,171.173) RC664.2@76.259,169.841 ; RC664.2@75.973,169.323 cw(c76.4,168.896) RC664.2@76.4,169.5 ; RC664.2@76.134,169.29 ccw(c76.134,169.966) RC664.2@76.612,169.488 ; RC664.2@76.259,169.941 ccw(c75.676,170.524) 76.5,170.524 ; CC426.1@76.273,171.073 cw(c75.726,170.526) 76.5,170.526 ; CC426.1@76.65,170.95 CC426.1@76.7,171
  Bottom Layer w0.5: pad.12@73.279,169.203 cw(c72.25,170.145) v1(72.25,168.75) 73.25,168.75 pad.12@73.5,169
NetCC427_1: CC427.1 pad.13 UC73.72 | length 7.6
  Top Layer w0.25: v1(97,180.25) 97.25,180 UC73.72@97.25,178.55
  Bottom Layer w0.5: CC427.1@95.75,178.5 CC427.1@96,178.5 97,179.5 v1(97,180.25) pad.13@95.75,180.25 ; pad.13@95.962,180.038 cw(c96.474,179.526) 96.474,180.25 cw(c96.474,180.974) pad.13@95.962,180.462 ; CC427.1@96.5,178.5 cw(c97.707,178.5) 96.854,179.354
NetCC440_2: CC440.2 pad.14 UC73.7 | length 10.5
  Top Layer w0.25: v1(89.8,173.5) 90.05,173.75 UC73.7@91.5,173.75
  Bottom Layer w0.25: pad.14@88,174.075 cw(c88,173.049) 88.726,173.774 cw(c89.451,174.5) pad.14@88.425,174.5 ; pad.14@88,174.5 89,173.5 v1(89.8,173.5) CC440.2@91,173.5 ; v1@89.606,173.306 ccw(c89.136,172.836) 89.136,173.5 ccw(c89.136,174.164) v1@89.606,173.694 ; v1@89.994,173.306 cw(c90.464,172.836) 90.464,173.5 cw(c90.464,174.164) v1@89.994,173.694 ; v1@90.103,173.5 ccw(c90.103,174.697) CC440.2@90.949,173.851 ; 90.345,173.5 cw(c90.345,172.645) CC440.2@90.949,173.249
NetCC446_2: CC446.2 pad.15 RC707.1 RC708.2 | length 11.8
  Top Layer w0.5: v1(15.75,144.5) RC708.2@16.9,144.5 RC707.1@16.9,147.5 ; RC708.2@16.759,144.359 ccw(c16.417,144.017) 16.417,144.5 ccw(c16.417,144.983) RC708.2@16.759,144.641 ; RC708.2@16.759,144.691 ccw(c16.417,145.033) 16.9,145.033 ccw(c17.383,145.033) RC708.2@17.041,144.691 ; RC707.1@16.759,147.309 cw(c16.417,146.967) 16.9,146.967 cw(c17.383,146.967) RC707.1@17.041,147.309 ; 16.9,145.276 cw(c17.674,145.276) CC446.2@17.127,145.823 ; 16.9,146.724 ccw(c17.674,146.724) CC446.2@17.127,146.177
  Bottom Layer w0.5: pad.15@12.75,144.5 v1(15.75,144.5) ; pad.15@12.962,144.288 cw(c13.474,143.776) 13.474,144.5 cw(c13.474,145.224) pad.15@12.962,144.712
NetCC447_1: CC447.1 pad.16 RC708.1 UC634.3 | length 9
  Top Layer w0.5: CC447.1@18.373,143.177 ccw(c17.826,143.724) 18.6,143.724 ; RC708.1@18.459,144.309 cw(c18.117,143.967) 18.6,143.967 cw(c19.083,143.967) RC708.1@18.741,144.309 ; CC447.1@18.57,143.02 UC634.3@21.4,143.02 ; CC447.1@18.6,143.05 RC708.1@18.6,144.5 ; CC447.1@18.727,142.823 cw(c19.202,142.348) 19.202,143.02 ; CC447.1@18.727,143.177 ccw(c19.105,143.555) 19.105,143.02
  Bottom Layer w0.5: pad.16@19.538,141.962 ccw(c19.026,142.474) 19.75,142.474 ccw(c20.474,142.474) pad.16@19.962,141.962 ; pad.16@19.75,141.75 v1(19.75,143.02)
NetCC448_2: CC448.2 pad.17 RC709.1 RC710.2 | length 10.1
  Top Layer w0.5: CC448.2@30.873,146.573 cw(c30.446,146.146) 31.05,146.146 cw(c31.654,146.146) 31.227,146.573 cw(c31.654,146.146) 31.654,146.75 cw(c31.654,147.354) CC448.2@31.227,146.927 ; RC710.2@31.05,143.55 CC448.2@31.05,146.5 ; 31.05,144.404 ccw(c31.704,144.404) RC710.2@31.241,143.941 ; 31.05,144.596 cw(c31.704,144.596) RC709.1@31.241,145.059 ; 31.05,145.904 ccw(c31.704,145.904) RC709.1@31.241,145.441 ; CC448.2@31.05,146.75 v1(32.25,146.75) ; RC710.2@31.1,143.5 RC710.2@31.1,143.55
  Bottom Layer w0.5: pad.17@32.5,145.5 32.25,145.75 v1(32.25,146.75) ccw(c33.645,146.75) pad.17@32.703,145.721
NetCC449_1: CC449.1 pad.18 RC710.1 UC634.12 | length 12.5
  Top Layer w0.5: UC634.12@26.6,143.02 28.92,143.02 29.4,143.5 CC449.1@29.4,142.05 ; UC634.12@27.275,143.02 ccw(c27.275,145.825) RC710.1@29.259,143.841 ; v1@28.483,143.02 ccw(c28.483,144.617) RC710.1@29.612,143.488 ; 29.02,143.12 ccw(c28.564,143.576) RC710.1@29.202,143.671 ; RC710.1@29.259,143.559 cw(c28.917,143.217) 29.4,143.217 cw(c29.883,143.217) RC710.1@29.541,143.559 ; 29.4,142.974 ccw(c30.174,142.974) CC449.1@29.627,142.427
  Bottom Layer w0.5: v1(28.25,143.02) pad.18@29.73,143.02 ; pad.18@29.518,142.808 ccw(c29.006,142.296) 29.006,143.02 ccw(c29.006,143.744) pad.18@29.518,143.232
NetCNC1_2: CNC1.2 DC11.2 pad.ICT@58.25,127.75 QC2.1 RC211.2 | length 27.2
  Bottom Layer w0.5: pad.ICT@58.038,127.962 ccw(c57.526,128.474) 58.25,128.474 ccw(c58.974,128.474) pad.ICT@58.462,127.962 ; RC211.2@58.109,129.259 cw(c57.767,128.917) 58.25,128.917 cw(c58.733,128.917) RC211.2@58.391,129.259 ; pad.ICT@58.25,127.45 cw(c58.25,126.726) 58.762,127.238 cw(c59.274,127.75) pad.ICT@58.55,127.75 ; RC211.2@58.25,129.4 pad.ICT@58.25,127.75 60,126 62.27,126 CNC1.2@63.77,127.5 63.77,130.22 DC11.2@64.05,130.5 62.05,132.5 QC2.1@60.75,132.5 ; QC2.1@60.897,132.353 cw(c61.25,132) 61.25,132.5 cw(c61.25,133) QC2.1@60.897,132.647 ; 63.111,131.439 cw(c62.172,130.5) DC11.2@63.5,130.5 ; CNC1.2@63.17,127.5 cw(c61.721,127.5) 62.746,126.476 cw(c63.77,125.451) CNC1.2@63.77,126.9 ; CNC1.2@63.346,127.924 ccw(c62.321,128.949) 63.77,128.949 ccw(c65.219,128.949) CNC1.2@64.194,127.924 ; DC11.2@63.353,131.197 ccw(c63.95,131.795) DC11.2@63.95,130.95 ; 63.77,128.979 cw(c65.471,128.979) DC11.2@64.268,130.182
NetCNC2_2: CNC2.2 pad.19 RC207.2 | length 9.4
  Bottom Layer w0.5: CNC2.2@47.23,213.25 48.35,214.37 RC207.2@48.35,215.5 pad.19@48.35,217.45 ; CNC2.2@47.23,213.8 ccw(c47.23,215.128) 48.169,214.189 ccw(c49.108,213.25) CNC2.2@47.78,213.25 ; pad.19@48.138,217.238 cw(c47.626,216.726) 48.35,216.726 cw(c49.074,216.726) pad.19@48.562,217.238 ; RC207.2@48.209,215.309 cw(c47.867,214.967) 48.35,214.967 cw(c48.833,214.967) RC207.2@48.491,215.309 ; RC207.2@48.209,215.691 ccw(c47.867,216.033) 48.35,216.033 ccw(c48.833,216.033) RC207.2@48.491,215.691
NetCNC4_2: CNC4.2 DC8.2 | length 5.9
  Bottom Layer w0.5: CNC4.2@127.861,71.361 cw(c126.922,70.422) 128.25,70.422 cw(c129.578,70.422) CNC4.2@128.639,71.361 ; DC8.2@128.073,68.927 ccw(c127.646,69.354) 128.25,69.354 ccw(c128.854,69.354) DC8.2@128.427,68.927 ; DC8.2@128.25,68.927 CNC4.2@128.25,71.75
NetCNC5_2: CNC5.2 DC7.2 | length 6.9
  Bottom Layer w0.5: CNC5.2@127.861,62.861 cw(c126.922,61.922) 128.25,61.922 cw(c129.578,61.922) CNC5.2@128.639,62.861 ; DC7.2@128.073,59.677 ccw(c127.646,60.104) 128.25,60.104 ccw(c128.854,60.104) DC7.2@128.427,59.677 ; CNC5.2@128.25,63.25 128.25,59.7 DC7.2@128.45,59.5
NetCNC7_2: CNC7.2 DC30.2 | length 5.9
  Bottom Layer w0.5: CNC7.2@127.861,79.861 cw(c126.922,78.922) 128.25,78.922 cw(c129.578,78.922) CNC7.2@128.639,79.861 ; CNC7.2@128.25,80.25 128.25,77.604 128.073,77.427 ccw(c127.646,77.854) 128.25,77.854 ccw(c128.854,77.854) DC30.2@128.427,77.427
NetCNC26_13: CNC26.13 RC647.2 | length 4.8
  Bottom Layer w0.5: RC647.2@116.75,169.85 CNC26.13@118.7,169.85 ; RC647.2@116.871,169.85 cw(c116.871,167.771) CNC26.13@118.341,169.241 ; RC647.2@116.941,169.709 cw(c117.283,169.367) 117.283,169.85 cw(c117.283,170.333) RC647.2@116.941,169.991 ; 117.933,169.85 ccw(c117.933,170.427) CNC26.13@118.341,170.019
NetCNC26_14: CNC26.14 RC648.2 | length 4.8
  Bottom Layer w0.5: CNC26.14@121.3,169.85 RC648.2@123.25,169.85 ; CNC26.14@121.659,169.241 cw(c123.129,167.771) RC648.2@123.129,169.85 ; CNC26.14@121.659,170.019 ccw(c122.067,170.427) 122.067,169.85 ; RC648.2@123.059,169.709 ccw(c122.717,169.367) 122.717,169.85 ccw(c122.717,170.333) RC648.2@123.059,169.991
NetDA5_1: DA5.1 DA5.3 pad.20 RA108.1 RA109.1 TA1.14
  other v2: 83,47.25 85.75,47.25 83,48.75 85.75,48.75 63.5,63 65,63 66.5,63 68,63 69.5,63 63.5,64.75 65,64.75 66.5,64.75 68,64.75 69.5,64.75
NetDA8_1: DA8.1 pad.21 QA5.2 TA1.4 Vd1.1
  other v2: 54,41.5 52.5,42.25 55.75,42.25 52.5,43.75 55.75,43.75 54,44.5 38.25,47.715 34.5,47.75 40.77,47.75 39.517,48.98 35.75,49
  other v3: 16,47.75 18.1,47.8 16,49.25 18,49.3
NetDA8_2: DA8.2 pad.22 RA114.2 | length 8.1
  Bottom Layer w0.5: pad.22@37.08,42.67 37.75,42.67 ; pad.22@37.292,42.458 cw(c37.804,41.946) 37.804,42.67 cw(c37.804,43.394) pad.22@37.292,42.882 ; 38.25,43.17 37.75,42.67 ; 38.42,42 37.75,42.67 ; DA8.2@38.97,42.14 ccw(c37.689,40.859) 37.689,42.67 ccw(c37.689,44.481) DA8.2@38.97,43.2 ; DA8.2@39.5,42.67 37.75,42.67
  other v2: 40.75,42.25
NetDA9_1: DA9.1 pad.ICT@55.25,63 TA1.1
  other v1: 54.5,65 55.75,65 57,65 57,66 57,67 57,68
  other v2: 52.8,57.25 55.55,57.25 52.8,58.75 55.55,58.75
NetDA9_2: DA9.2 pad.ICT@50,66.5 RA123.1 | length 1.2
  Bottom Layer w1: v1(48.75,66.5) pad.ICT@50,66.5
NetDA10_2: DA10.2 pad.ICT@80.25,62.5 RA118.1 RA121.1 TA1.16 | length 18.4
  Bottom Layer w1.5: pad.ICT@80.372,62.622 cw(c82.25,60.744) v2@82.25,63.4 ; 81.75,61 pad.ICT@80.25,62.5 ; 81.75,64 pad.ICT@80.25,62.5 ; v2@82.356,61.856 ccw(c80.801,60.301) 80.801,62.5 ccw(c80.801,64.699) v2@82.356,63.144 ; v2@82.382,61.821 ccw(c81.25,61.217) 81.25,62.5 ; v2@82.382,63.179 cw(c81.25,63.783) 81.25,62.5 ; pad.ICT@80.25,62.5 81.25,62.5 ; 80.875,61.875 ccw(c81.782,62.782) 82.312,61.613 cw(c81.782,62.782) 80.875,61.875 ; 82.032,64.282 ccw(c81.264,65.05) 82.35,65.05 cw(c81.264,65.05) 82.032,64.282
  other v2: 83,57.25 85.75,57.25 83,58.75 85.75,58.75 82.25,61.75 83.5,61.75 84.75,61.75 82.25,63.25 83.5,63.25 84.75,63.25
NetDA11_1: DA11.1 DA11.3 pad.ICT@87.75,17.75 RA127.1 RA131.1 TA1.9
  other v2: 84.25,21.5 83,22.25 85.75,22.25 83,23.75 85.75,23.75
  other v4: 90.25,19.75 90.25,21.25 90.25,22.75
NetDA13_1: DA13.1 DA13.3 pad.ICT@89,28 RA143.1 RA144.1 TA1.10
  other v2: 83,27.25 85.75,27.25 83,28.75 85.75,28.75 90.25,33.5 90.25,34.75 91.75,36.75
NetDA14_1: DA14.1 pad.ICT@8.3,58.2 RA145.1 | length 8.4
  Bottom Layer w1: pad.ICT@8.3,58.2 DA14.1@11,58.2 12.05,58.2 12.75,57.5 13.3,57.5 RA145.1@13.55,57.25 ; DA14.1@11.08,57.917 cw(c11.639,56.639) 12.625,57.625 ; 12.45,57.8 ccw(c13.081,58.431) RA145.1@13.483,57.634
NetDA14_2: DA14.2 pad.ICT@9,61.75 RA146.1 RA148.1 UA12.6 | length 24.5
  Top Layer w0.5: v1(13.55,64.25) 13.55,65.8 17.25,69.5 21,69.5 21.75,70.25 21.75,71.25 22.615,72.115 UA12.6@23.6,72.115 ; 22.399,71.899 cw(c22.8,71.498) UA12.6@22.8,72.065
  Bottom Layer w1: pad.ICT@9,61.75 DA14.2@10.6,61.75 ; DA14.2@11,61.8 RA146.1@13.35,61.8 ; 12.705,61.8 ccw(c12.705,62.845) RA146.1@13.444,62.106 ; RA148.1@13.55,59.75 RA146.1@13.55,62.25 v1(13.55,64.25)
NetDA17_2: DA17.2 pad.ICT@40.5,82.85 RA186.1 RA215.1 UA20.4 | length 11.4
  Top Layer w0.5: UA20.4@40.5,82.87 v1(40.5,84.5) ; UA20.4@40.52,82.85 40.52,81.28 DA17.2@41.3,80.5 42.15,81.35 RA215.1@45.25,81.35
  Bottom Layer w0.5: pad.ICT@40.288,83.062 ccw(c39.776,83.574) 40.5,83.574 ccw(c41.224,83.574) pad.ICT@40.712,83.062 ; pad.ICT@40.5,82.85 v1(40.5,84.5)
NetDC9_1: DC9.1 pad.ICT@96.45,210.95 RC125.1 | length 10.9
  Bottom Layer w0.5: RC125.1@91.5,212.6 92.35,212.6 DC9.1@94,210.95 pad.ICT@96.45,210.95 ; RC125.1@91.691,212.459 cw(c92.033,212.117) 92.033,212.6 cw(c92.033,213.083) RC125.1@91.691,212.741 ; 93.061,211.889 ccw(c94,212.828) DC9.1@94,211.5 ; DC9.1@93.303,211.647 cw(c92.705,211.05) DC9.1@93.55,211.05 ; DC9.1@94.318,210.632 cw(c95.086,209.864) 95.086,210.95 cw(c95.086,212.036) DC9.1@94.318,211.268 ; pad.ICT@96.238,210.738 ccw(c95.726,210.226) 95.726,210.95 ccw(c95.726,211.674) pad.ICT@96.238,211.162
NetDC10_1: DC10.1 pad.ICT@55,140.5 RC134.2 | length 17.5
  Top Layer w0.5: DC10.1@55.978,140.242 cw(c54.792,138.684) v1@56.75,138.684 ; DC10.1@56.25,141.25 ccw(c56.25,142.457) 57.104,141.604 ; DC10.1@56.28,140.64 cw(c55.56,139.692) 56.75,139.692 ; DC10.1@56.7,140.8 cw(c57.666,140.8) 56.983,141.483 ; v1(56.75,138.75) 56.75,140 56.25,140.5 DC10.1@56.25,140.7 56.25,140.75 57.75,142.25 ; 57.29,141.79 cw(c58.4,140.681) RC134.2@58.4,142.25 ; 57.525,142.025 cw(c58.143,141.407) RC134.2@58.352,142.256 ; RC134.2@58.221,142.54 cw(c57.75,142.778) 57.75,142.25 ; RC134.2@58.4,142.5 58.15,142.25 57.75,142.25
  Bottom Layer w0.25: pad.ICT@55,140.075 cw(c55,139.049) 55.726,139.774 cw(c56.451,140.5) pad.ICT@55.425,140.5 ; pad.ICT@55,140.5 v1(56.75,138.75) ; v1@56.475,138.75 ccw(c55.811,138.75) 56.281,139.219 ccw(c56.75,139.689) v1@56.75,139.025
NetDC33_1: DC33.1 DC42.1 pad.ICT@25.9,203.25 RC493.1 RC495.2 | length 22.2
  Top Layer w0.5: v1(25.25,208.25) 25.25,208.8 DC33.1@26.2,209.75 DC42.1@26.2,212.25 DC42.1@26.2,212.05 ; 25.3,208.85 ccw(c24.453,209.697) DC33.1@25.65,209.736 ; v1@25.4,208.25 cw(c27.09,208.25) DC33.1@25.895,209.445 ; DC33.1@25.503,209.053 cw(c26.1,208.455) DC33.1@26.1,209.3 ; DC33.1@25.882,210.068 ccw(c25.114,210.836) 26.2,210.836 ccw(c27.286,210.836) DC33.1@26.518,210.068 ; DC42.1@26.023,212.073 cw(c25.596,211.646) 26.2,211.646 cw(c26.804,211.646) DC42.1@26.377,212.073
  Bottom Layer w0.5: 25.25,207.25 ccw(c26.425,207.25) RC495.2@25.72,206.31 ; RC495.2@25.473,206.927 ccw(c25.9,207.354) RC495.2@25.9,206.75 ; pad.ICT@25.688,203.462 ccw(c25.176,203.974) 25.9,203.974 ccw(c26.624,203.974) pad.ICT@26.112,203.462 ; RC493.1@25.759,204.809 cw(c25.417,204.467) 25.9,204.467 cw(c26.383,204.467) RC493.1@26.041,204.809 ; RC493.1@25.759,205.191 ccw(c25.417,205.533) 25.9,205.533 ccw(c26.383,205.533) RC493.1@26.041,205.191 ; RC495.2@25.759,206.309 cw(c25.417,205.967) 25.9,205.967 cw(c26.383,205.967) RC495.2@26.041,206.309 ; pad.ICT@25.9,203.25 RC493.1@25.9,205 RC495.2@25.9,206.5 25.25,207.15 v1(25.25,208.25) ccw(c27.175,208.25) RC495.2@26.02,206.71
NetDC34_2: DC34.2 pad.ICT@20.75,222.5 RC346.1 | length 16.3
  Bottom Layer w0.25: pad.ICT@20.75,222.5 21.9,223.65 RC346.1@23.25,223.65 23,223.4 23,220.45 DC34.2@24.7,218.75 ; pad.ICT@20.75,222.925 ccw(c20.75,223.951) 21.476,223.226 ccw(c22.201,222.5) pad.ICT@21.175,222.5 ; RC346.1@22.97,223.42 ccw(c22.415,222.865) 22.415,223.65 ccw(c22.415,224.435) RC346.1@22.97,223.88 ; 23,222.383 cw(c24.467,222.383) RC346.1@23.43,223.42 ; 23,222.986 cw(c23.864,222.986) RC346.1@23.253,223.597 ; 23.548,219.902 cw(c22.395,218.75) DC34.2@24.025,218.75 ; 23.789,219.661 ccw(c24.6,220.472) DC34.2@24.6,219.325 ; 23.974,219.476 cw(c23.249,218.75) DC34.2@24.275,218.75
NetDC37_2: DC37.2 DC38.2 pad.ICT@81.75,200.5 RC154.2 RC381.2 | length 15.2
  Top Layer w0.25: DC37.2@78.5,200.95 78.95,200.5 DC37.2@79,200.5
  Top Layer w0.5: DC37.2@78.874,201.101 ccw(c80,201.856) v1(80,200.5) ; DC37.2@79,200.5 v1(80,200.5) ; v1@80.226,200.5 cw(c80.226,199.676) RC154.2@80.809,200.259 ; RC154.2@81.069,200.5 ccw(c81.069,202.781) DC38.2@82.682,201.168 ; RC154.2@81.191,200.259 cw(c81.774,199.676) 81.774,200.5 ; 82.276,200.5 ccw(c82.276,201.574) DC38.2@83.035,200.815 ; DC38.2@83,200.95 82.55,200.5 v1(80,200.5)
  Bottom Layer w0.5: RC381.2@79.709,201.809 cw(c79.005,201.105) 80,201.105 ; RC381.2@80,201.85 v1(80,200.5) pad.ICT@81.75,200.5 ; pad.ICT@81.538,200.288 ccw(c81.026,199.776) 81.026,200.5 ccw(c81.026,201.224) pad.ICT@81.538,200.712
NetDC45_1: DC45.1 pad.ICT@24.25,170.5 QC40.3 RC451.1 RC458.1 | length 20.9
  Bottom Layer w0.5: 18.5,168.976 cw(c19.324,168.976) RC458.1@18.741,169.559 ; 18.5,169.069 ccw(c20.269,169.069) DC45.1@19.018,167.818 ; RC458.1@18.741,169.659 cw(c19.566,168.834) 19.566,170 ; DC45.1@18.8,167.5 18.5,167.8 18.5,169.5 19,170 21.25,170 QC40.3@21.75,170.5 ; 19.731,170 ccw(c19.731,172.563) QC40.3@21.543,170.751 ; RC451.1@20.9,172.25 cw(c20.9,171.646) RC451.1@21.327,172.073 ; RC451.1@20.9,172.5 21.575,171.825 QC40.3@21.575,170.897 ; 20.938,170 ccw(c20.938,171.356) QC40.3@21.897,170.397 ; 21.332,170.082 ccw(c20.942,170.473) QC40.3@21.486,170.568 ; 21.575,171.737 ccw(c22.467,171.737) QC40.3@21.836,171.106 ; QC40.3@21.69,170.782 22.222,170.25 24,170.25 pad.ICT@24.25,170.5 ; QC40.3@21.836,170.751 ccw(c23.045,171.96) 23.045,170.25 ; 22.922,170.25 ccw(c22.922,171.828) pad.ICT@24.038,170.712
NetDC46_2: DC46.2 pad.ICT@12.75,172 RC453.1 RC463.2 | length 14.8
  Top Layer w0.5: v1(15.75,172.25) v1@16,172 ; v1@15.856,172.356 ccw(c16.716,173.216) RC453.1@16.716,172 ; RC453.1@16.752,171.666 ccw(c16,170.988) v1@16,172 ; RC453.1@16.9,172 v1@16,172
  Bottom Layer w0.5: pad.ICT@12.75,172 13.2,172 DC46.2@14.45,173.25 ; pad.ICT@12.75,172.3 ccw(c12.75,174.111) 14.03,172.83 ; 13.811,172.611 cw(c14.75,171.672) 14.75,173 cw(c14.75,172.396) DC46.2@15.177,172.823 ; DC46.2@14.053,172.853 ccw(c13.455,173.45) DC46.2@14.3,173.45 ; DC46.2@14.7,173.55 DC46.2@14.75,173.55 14.75,173.25 v1@16,172 ; DC46.2@15.2,173.45 ccw(c16.769,173.45) v1@15.66,172.34 ; v1@15.856,172.356 ccw(c16.716,173.216) RC463.2@16.716,172 ; RC463.2@16.75,172 v1@16,172 ; RC463.2@16.752,171.666 ccw(c16,170.988) v1@16,172
NetDC47_1: DC47.1 pad.ICT@23.25,189.25 QC41.3 RC452.1 RC461.1 | length 18
  Bottom Layer w0.5: RC461.1@16.75,186.85 18.25,186.85 19.558,186.85 ; RC461.1@17.191,187.241 ccw(c18.136,188.186) RC452.1@18.136,186.85 ; RC461.1@17.364,186.85 ccw(c17.364,188.186) RC452.1@18.309,187.241 ; RC452.1@18.699,187.234 ccw(c19.558,188.003) 19.558,186.85 ; 20.061,186.347 cw(c19.404,185.69) QC41.3@20.333,185.69 ; 20.111,188.311 ccw(c19.172,189.25) DC47.1@20.5,189.25 ; DC47.1@20.353,188.553 cw(c20.95,187.955) DC47.1@20.95,188.8 ; QC41.3@20.718,185.69 19.558,186.85 ; DC47.1@21.468,188.932 cw(c22.236,188.164) 22.236,189.25 cw(c22.236,190.336) DC47.1@21.468,189.568 ; pad.ICT@23.038,189.038 ccw(c22.526,188.526) 22.526,189.25 ccw(c22.526,189.974) pad.ICT@23.038,189.462 ; pad.ICT@23.25,189.25 DC47.1@21.05,189.25 19.558,187.758 19.558,186.85
NetDC48_2: DC48.2 pad.ICT@12.5,175 RC456.1 RC464.2 | length 14.1
  Bottom Layer w0.3: DC48.2@14.75,176.7 DC48.2@14.95,176.5
  Bottom Layer w0.5: pad.ICT@12.5,175 12.8,175 DC48.2@14.75,176.95 ; pad.ICT@12.5,175.3 ccw(c12.5,176.749) 13.524,175.724 ; 13.811,176.011 cw(c14.75,175.072) DC48.2@14.75,176.4 ; DC48.2@14.053,176.253 ccw(c13.455,176.85) DC48.2@14.3,176.85 ; DC48.2@14.75,176.7 16.05,178 ; DC48.2@14.768,177.5 ccw(c14.839,179.211) 16.05,178 ; RC456.1@16.759,177.859 ccw(c16.417,177.517) 16.417,178 ccw(c16.417,178.483) RC456.1@16.759,178.141 ; RC456.1@16.759,178.191 ccw(c16.417,178.533) 16.9,178.533 ccw(c17.383,178.533) RC456.1@17.041,178.191 ; RC464.2@16.759,179.309 cw(c16.417,178.967) 16.9,178.967 cw(c17.383,178.967) RC464.2@17.041,179.309 ; RC464.2@16.9,179.5 RC456.1@16.9,178 16.05,178
NetDC49_1: DC49.1 pad.ICT@32.75,189.75 RC483.2 | length 22.7
  Top Layer w0.25: DC49.1@30.75,181.2 32.1,182.55 32.1,190.6 v1(32.5,191) ; DC49.1@30.75,181.625 ccw(c30.75,182.651) 31.476,181.926 ; DC49.1@30.75,181.875 ccw(c30.75,183.505) 31.902,182.352 ; DC49.1@31.325,181.3 cw(c32.472,181.3) 31.661,182.111
  Top Layer w0.5: DC49.1@30.432,180.782 cw(c29.664,180.014) 30.75,180.014 cw(c31.836,180.014) DC49.1@31.068,180.782 ; DC49.1@30.75,180.628 ccw(c32.428,180.628) RC483.2@31.241,179.441 ; DC49.1@30.75,181.2 30.75,179.6 RC483.2@31.1,179.25
  Bottom Layer w0.25: v1@32.306,190.806 cw(c31.836,190.336) 32.5,190.336 cw(c33.164,190.336) v1@32.694,190.806 ; pad.ICT@32.5,189.75 v1(32.5,191) ccw(c33.57,191) pad.ICT@32.983,190.105 ; 32.5,190.537 ccw(c33.266,190.537) pad.ICT@32.846,189.896
NetDC50_1: DC50.1 pad.ICT@26.75,171.75 RC484.2 | length 12.4
  Bottom Layer w0.25: RC484.2@25.75,174.5 26.15,174.1 RC484.2@26.15,173.85 ; 25.75,174.593 ccw(c26.693,174.593) RC484.2@26.026,173.926 ; 25.75,175.197 ccw(c27.297,175.197) RC484.2@26.203,174.103 ; 25.75,175.8 ccw(c27.9,175.8) RC484.2@26.38,174.28 ; RC484.2@25.92,173.72 cw(c25.365,173.165) 26.15,173.165 cw(c26.935,173.165) RC484.2@26.38,173.72 ; RC484.2@26.15,173.75 25.75,174.15 25.75,176.5 26.45,177.2 DC50.1@26.75,177.2 ; RC484.2@26.15,174 26.15,172.35 pad.ICT@26.75,171.75